# EAGLE board color_sensor_node-Panel (EAGLE 9.6.0)
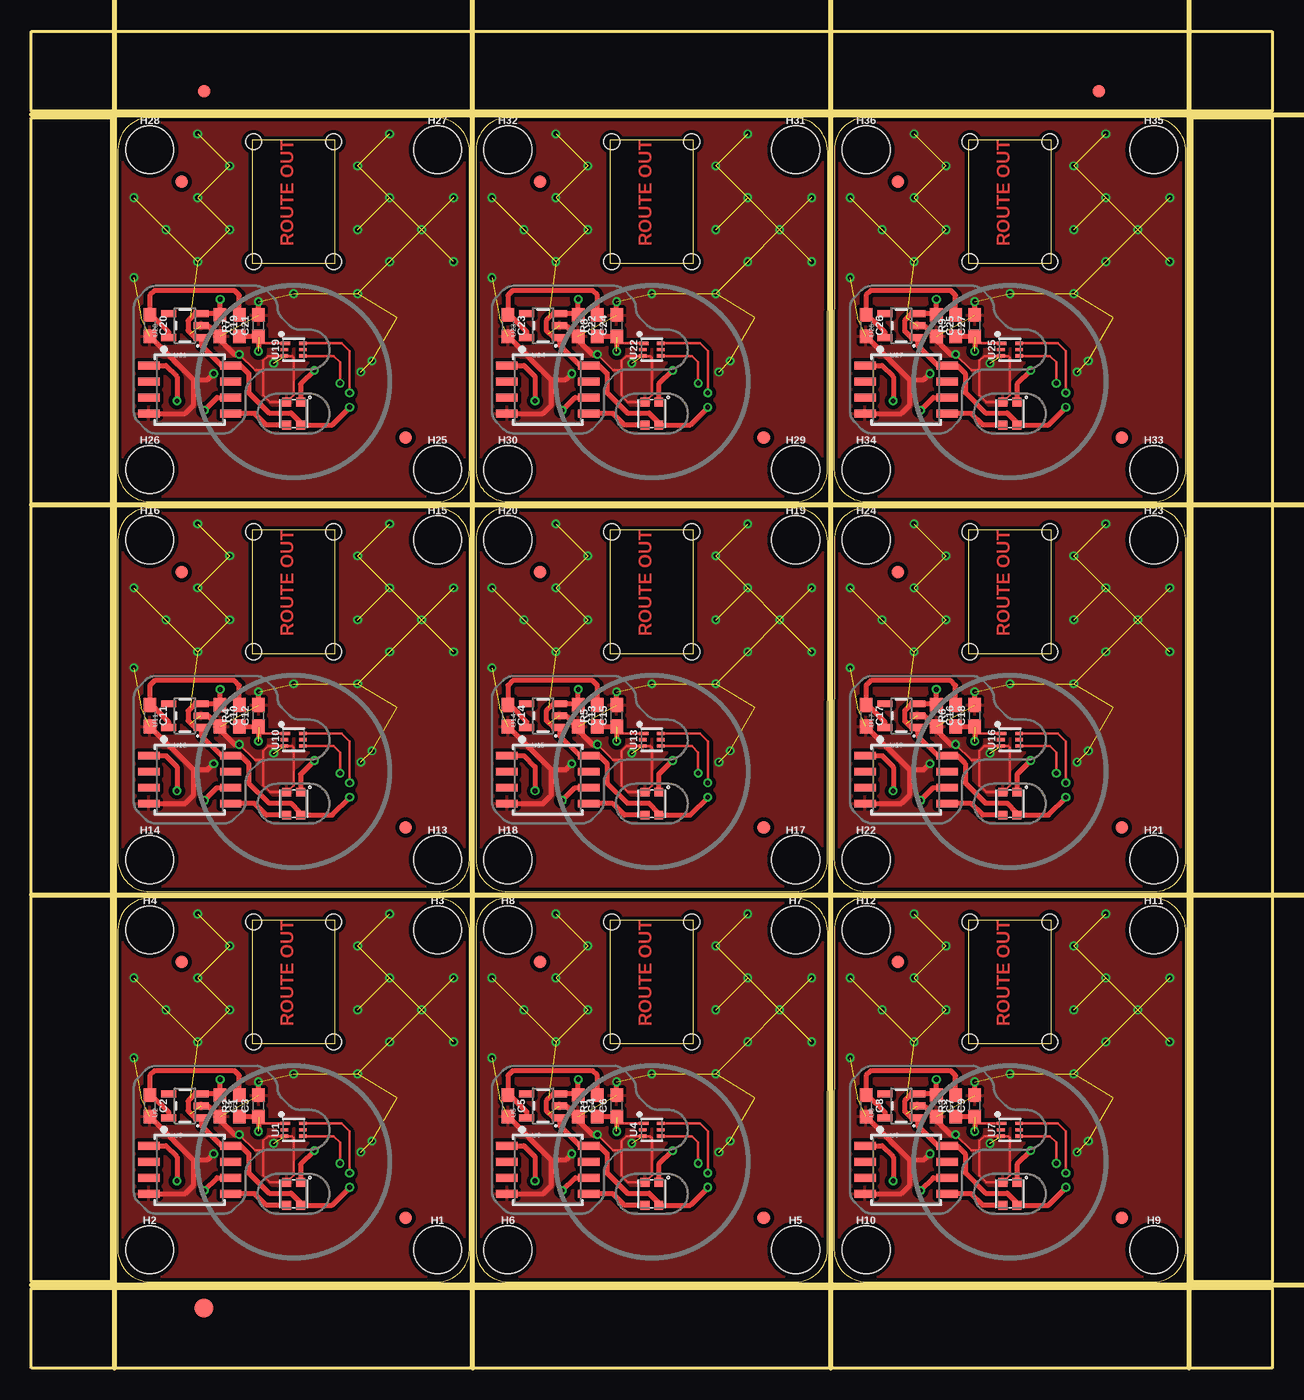
[diagram p0: board, top side]
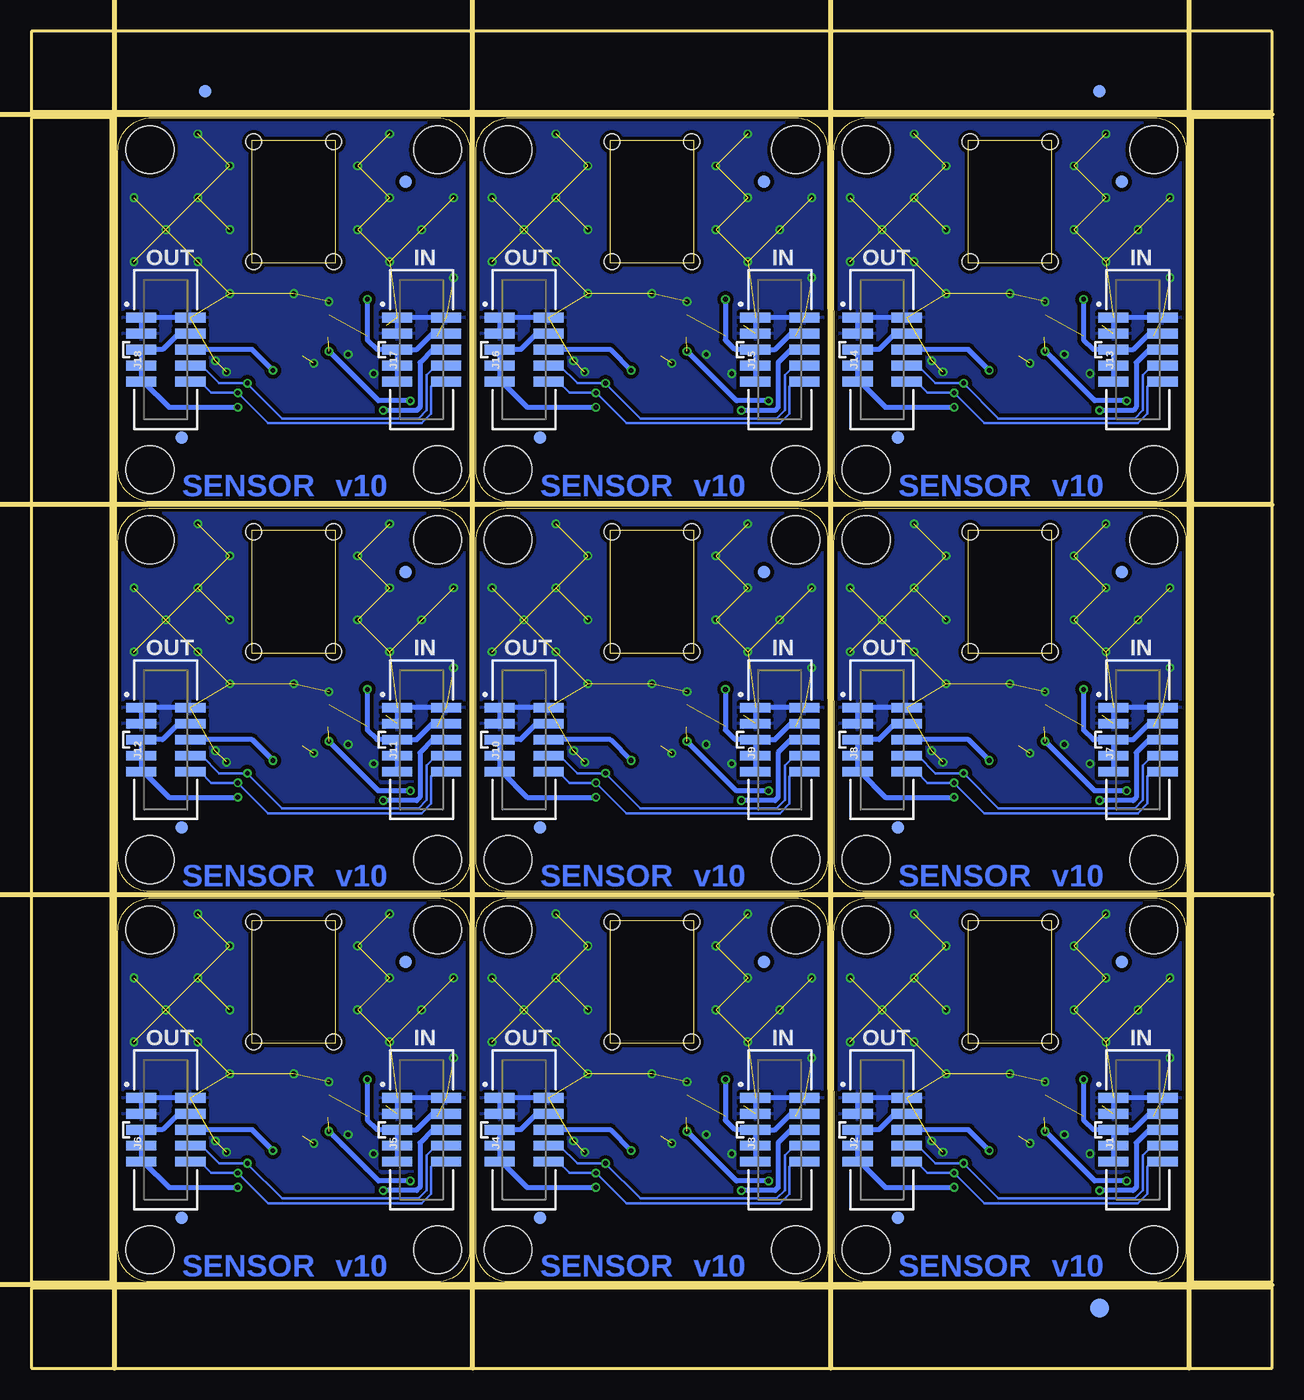
[diagram p1: board, bottom side, seen from below]

Size 98.56 x 106.17 mm. Coordinates in mm from the lower left corner, seen from the top.
Outline: 6.87,34.81 6.86,9.4 arc90 9.4,6.86 32.26,6.86 arc90 34.79,9.39 34.8,34.65 arc90 32.12,37.34 9.4,37.34 arc90 6.87,34.81
Outline: 17.53,35.56 17.53,25.78 24.13,25.78 24.13,35.56 17.53,35.56
Outline: 35.32,34.81 35.31,9.4 arc90 37.85,6.86 60.71,6.86 arc90 63.24,9.39 63.25,34.65 arc90 60.56,37.34 37.85,37.34 arc90 35.32,34.81
Outline: 45.98,35.56 45.98,25.78 52.58,25.78 52.58,35.56 45.98,35.56
Outline: 63.77,34.81 63.76,9.4 arc90 66.3,6.86 89.16,6.86 arc90 91.7,9.39 91.7,34.65 arc90 89.02,37.34 66.3,37.34 arc90 63.77,34.81
Outline: 74.43,35.56 74.43,25.78 81.03,25.78 81.03,35.56 74.43,35.56
Outline: 6.87,65.79 6.86,40.39 arc90 9.4,37.85 32.26,37.85 arc90 34.79,40.38 34.8,65.64 arc90 32.12,68.33 9.4,68.33 arc90 6.87,65.79
Outline: 17.53,66.55 17.53,56.77 24.13,56.77 24.13,66.55 17.53,66.55
Outline: 35.32,65.79 35.31,40.39 arc90 37.85,37.85 60.71,37.85 arc90 63.24,40.38 63.25,65.64 arc90 60.56,68.33 37.85,68.33 arc90 35.32,65.79
Outline: 45.98,66.55 45.98,56.77 52.58,56.77 52.58,66.55 45.98,66.55
Outline: 63.77,65.79 63.76,40.39 arc90 66.3,37.85 89.16,37.85 arc90 91.7,40.38 91.7,65.64 arc90 89.02,68.33 66.3,68.33 arc90 63.77,65.79
Outline: 74.43,66.55 74.43,56.77 81.03,56.77 81.03,66.55 74.43,66.55
Outline: 6.87,96.78 6.86,71.38 arc90 9.4,68.83 32.26,68.83 arc90 34.79,71.37 34.8,96.62 arc90 32.12,99.31 9.4,99.31 arc90 6.87,96.78
Outline: 17.53,97.54 17.53,87.76 24.13,87.76 24.13,97.54 17.53,97.54
Outline: 35.32,96.78 35.31,71.38 arc90 37.85,68.83 60.71,68.83 arc90 63.24,71.37 63.25,96.62 arc90 60.56,99.31 37.85,99.31 arc90 35.32,96.78
Outline: 45.98,97.54 45.98,87.76 52.58,87.76 52.58,97.54 45.98,97.54
Outline: 63.77,96.78 63.76,71.38 arc90 66.3,68.83 89.16,68.83 arc90 91.7,71.37 91.7,96.62 arc90 89.02,99.31 66.3,99.31 arc90 63.77,96.78
Outline: 74.43,97.54 74.43,87.76 81.03,87.76 81.03,97.54 74.43,97.54
Outline: 0,6.35 98.56,6.35 98.56,0 0,0 0,6.35
Outline: 92.21,99.31 98.56,99.31 98.56,6.86 92.21,6.86 92.21,99.31
Outline: 0,106.17 98.56,106.17 98.56,99.82 0,99.82 0,106.17
Outline: 0,99.31 6.35,99.31 6.35,6.86 0,6.86 0,99.31
Copper layers (1*16): Top 0.035mm / dielectric 1.5mm / Bottom 0.035mm
Design rules "color_sensor_node": minimum track width 6mil, minimum drill 0.3mm, track to track 6mil, track to pad 6mil, pad to pad 6mil, via to via 6mil, smd to smd 6mil, copper to edge 6mil, drill to drill 6mil, minimum pad ring 6mil, minimum via ring 6mil, stop-mask expansion 4mil, vias tented up to drill 25mil, thermal gap 10mil
Holes 1.27 mm at 17.65,35.43 24,35.43 17.65,25.91 24,25.91 46.1,35.43 52.45,35.43 46.1,25.91 52.45,25.91 74.55,35.43 80.9,35.43 74.55,25.91 80.9,25.91 17.65,66.42 24,66.42 17.65,56.9 24,56.9 46.1,66.42 52.45,66.42 46.1,56.9 52.45,56.9 74.55,66.42 80.9,66.42 74.55,56.9 80.9,56.9 17.65,97.41 24,97.41 17.65,87.88 24,87.88 46.1,97.41 52.45,97.41 46.1,87.88 52.45,87.88 74.55,97.41 80.9,97.41 74.55,87.88 80.9,87.88
Milling: 8 lines

## Footprints (pad centres in the part's own frame; a part is rotated, then mirrored left to right if it is on the bottom)
0603 = smd 1.1 x 1: 1 -0.85,0; 2 0.85,0
WS2812-2020 = smd 0.7 x 0.7: 1 0.915,-0.55; 2 0.915,0.55; 3 -0.915,0.55; 4 -0.915,-0.55
FIDUCIAL-1X2 = smd 1 x 1: 1 0,0
FIDUCIAL-1.5X3 = smd 1.5 x 1.5: 1 0,0
STAND-OFF-#8 = hole 3.81: 0,0
2X5-SMD-1.27MM = smd 0.76 x 2.4: 1 2.54,1.95; 2 2.54,-1.95; 3 1.27,1.95; 4 1.27,-1.95; 5 0,1.95; 6 0,-1.95; 7 -1.27,1.95; 8 -1.27,-1.95; 9 -2.54,1.95; 10 -2.54,-1.95
ODFN-6 = smd 0.75 x 0.25: 1 -0.645,0.5 | smd 0.6 x 0.25: 2 -0.72,0; 3 -0.72,-0.5; 4 0.72,-0.5; 5 0.72,0; 6 0.72,0.5
SOT23-5 = smd 0.55 x 1.2: 1 -0.95,-1.3; 2 0,-1.3; 3 0.95,-1.3; 4 0.95,1.3; 5 -0.95,1.3
SOIC-8 = smd 0.61 x 1.702: 1 -1.905,-3.251; 2 -0.635,-3.251; 3 0.635,-3.251; 4 1.905,-3.251; 5 1.905,3.251; 6 0.635,3.251; 7 -0.635,3.251; 8 -1.905,3.251

## Placement (x,y rotation side)
C1  1.0uF  [0603]  14.99,20.83 270 top
C2  1.0uF  [0603]  9.4,20.83 270 top
C3  1.0uF  [0603]  18.03,20.83 90 top
C4  1.0uF  [0603]  43.44,20.83 270 top
C5  1.0uF  [0603]  37.85,20.83 270 top
C6  1.0uF  [0603]  46.48,20.83 90 top
C7  1.0uF  [0603]  71.89,20.83 270 top
C8  1.0uF  [0603]  66.3,20.83 270 top
C9  1.0uF  [0603]  74.94,20.83 90 top
C10  1.0uF  [0603]  14.99,51.82 270 top
C11  1.0uF  [0603]  9.4,51.82 270 top
C12  1.0uF  [0603]  18.03,51.82 90 top
C13  1.0uF  [0603]  43.44,51.82 270 top
C14  1.0uF  [0603]  37.85,51.82 270 top
C15  1.0uF  [0603]  46.48,51.82 90 top
C16  1.0uF  [0603]  71.89,51.82 270 top
C17  1.0uF  [0603]  66.3,51.82 270 top
C18  1.0uF  [0603]  74.94,51.82 90 top
C19  1.0uF  [0603]  14.99,82.8 270 top
C20  1.0uF  [0603]  9.4,82.8 270 top
C21  1.0uF  [0603]  18.03,82.8 90 top
C22  1.0uF  [0603]  43.44,82.8 270 top
C23  1.0uF  [0603]  37.85,82.8 270 top
C24  1.0uF  [0603]  46.48,82.8 90 top
C25  1.0uF  [0603]  71.89,82.8 270 top
C26  1.0uF  [0603]  66.3,82.8 270 top
C27  1.0uF  [0603]  74.94,82.8 90 top
D1  WS2812B  [WS2812-2020]  20.83,13.84 90 top
D2  WS2812B  [WS2812-2020]  49.28,13.84 90 top
D3  WS2812B  [WS2812-2020]  77.73,13.84 90 top
D4  WS2812B  [WS2812-2020]  20.83,44.83 90 top
D5  WS2812B  [WS2812-2020]  49.28,44.83 90 top
D6  WS2812B  [WS2812-2020]  77.73,44.83 90 top
D7  WS2812B  [WS2812-2020]  20.83,75.82 90 top
D8  WS2812B  [WS2812-2020]  49.28,75.82 90 top
D9  WS2812B  [WS2812-2020]  77.73,75.82 90 top
E$1  [FIDUCIAL-1X2]  13.72,101.41 0 top
E$2  [FIDUCIAL-1X2]  13.72,101.41 0 bottom
E$3  [FIDUCIAL-1X2]  84.78,101.41 0 top
E$4  [FIDUCIAL-1X2]  84.78,101.41 0 bottom
E$5  [FIDUCIAL-1.5X3]  13.72,4.76 0 top
E$6  [FIDUCIAL-1.5X3]  13.72,4.76 0 bottom
FD1  FIDUCIAL1X2  [FIDUCIAL-1X2]  11.94,32.26 0 top
FD2  FIDUCIAL1X2  [FIDUCIAL-1X2]  29.72,11.94 0 top
FD3  FIDUCIAL1X2  [FIDUCIAL-1X2]  11.94,32.26 0 bottom
FD4  FIDUCIAL1X2  [FIDUCIAL-1X2]  29.72,11.94 0 bottom
FD5  FIDUCIAL1X2  [FIDUCIAL-1X2]  40.39,32.26 0 top
FD6  FIDUCIAL1X2  [FIDUCIAL-1X2]  58.17,11.94 0 top
FD7  FIDUCIAL1X2  [FIDUCIAL-1X2]  40.39,32.26 0 bottom
FD8  FIDUCIAL1X2  [FIDUCIAL-1X2]  58.17,11.94 0 bottom
FD9  FIDUCIAL1X2  [FIDUCIAL-1X2]  68.84,32.26 0 top
FD10  FIDUCIAL1X2  [FIDUCIAL-1X2]  86.62,11.94 0 top
FD11  FIDUCIAL1X2  [FIDUCIAL-1X2]  68.84,32.26 0 bottom
FD12  FIDUCIAL1X2  [FIDUCIAL-1X2]  86.62,11.94 0 bottom
FD13  FIDUCIAL1X2  [FIDUCIAL-1X2]  11.94,63.25 0 top
FD14  FIDUCIAL1X2  [FIDUCIAL-1X2]  29.72,42.93 0 top
FD15  FIDUCIAL1X2  [FIDUCIAL-1X2]  11.94,63.25 0 bottom
FD16  FIDUCIAL1X2  [FIDUCIAL-1X2]  29.72,42.93 0 bottom
FD17  FIDUCIAL1X2  [FIDUCIAL-1X2]  40.39,63.25 0 top
FD18  FIDUCIAL1X2  [FIDUCIAL-1X2]  58.17,42.93 0 top
FD19  FIDUCIAL1X2  [FIDUCIAL-1X2]  40.39,63.25 0 bottom
FD20  FIDUCIAL1X2  [FIDUCIAL-1X2]  58.17,42.93 0 bottom
FD21  FIDUCIAL1X2  [FIDUCIAL-1X2]  68.84,63.25 0 top
FD22  FIDUCIAL1X2  [FIDUCIAL-1X2]  86.62,42.93 0 top
FD23  FIDUCIAL1X2  [FIDUCIAL-1X2]  68.84,63.25 0 bottom
FD24  FIDUCIAL1X2  [FIDUCIAL-1X2]  86.62,42.93 0 bottom
FD25  FIDUCIAL1X2  [FIDUCIAL-1X2]  11.94,94.23 0 top
FD26  FIDUCIAL1X2  [FIDUCIAL-1X2]  29.72,73.91 0 top
FD27  FIDUCIAL1X2  [FIDUCIAL-1X2]  11.94,94.23 0 bottom
FD28  FIDUCIAL1X2  [FIDUCIAL-1X2]  29.72,73.91 0 bottom
FD29  FIDUCIAL1X2  [FIDUCIAL-1X2]  40.39,94.23 0 top
FD30  FIDUCIAL1X2  [FIDUCIAL-1X2]  58.17,73.91 0 top
FD31  FIDUCIAL1X2  [FIDUCIAL-1X2]  40.39,94.23 0 bottom
FD32  FIDUCIAL1X2  [FIDUCIAL-1X2]  58.17,73.91 0 bottom
FD33  FIDUCIAL1X2  [FIDUCIAL-1X2]  68.84,94.23 0 top
FD34  FIDUCIAL1X2  [FIDUCIAL-1X2]  86.62,73.91 0 top
FD35  FIDUCIAL1X2  [FIDUCIAL-1X2]  68.84,94.23 0 bottom
FD36  FIDUCIAL1X2  [FIDUCIAL-1X2]  86.62,73.91 0 bottom
H1  STAND-OFF#8  [STAND-OFF-#8]  32.26,9.4 0 top
H2  STAND-OFF#8  [STAND-OFF-#8]  9.4,9.4 0 top
H3  STAND-OFF#8  [STAND-OFF-#8]  32.26,34.8 0 top
H4  STAND-OFF#8  [STAND-OFF-#8]  9.4,34.8 0 top
H5  STAND-OFF#8  [STAND-OFF-#8]  60.71,9.4 0 top
H6  STAND-OFF#8  [STAND-OFF-#8]  37.85,9.4 0 top
H7  STAND-OFF#8  [STAND-OFF-#8]  60.71,34.8 0 top
H8  STAND-OFF#8  [STAND-OFF-#8]  37.85,34.8 0 top
H9  STAND-OFF#8  [STAND-OFF-#8]  89.16,9.4 0 top
H10  STAND-OFF#8  [STAND-OFF-#8]  66.3,9.4 0 top
H11  STAND-OFF#8  [STAND-OFF-#8]  89.16,34.8 0 top
H12  STAND-OFF#8  [STAND-OFF-#8]  66.3,34.8 0 top
H13  STAND-OFF#8  [STAND-OFF-#8]  32.26,40.39 0 top
H14  STAND-OFF#8  [STAND-OFF-#8]  9.4,40.39 0 top
H15  STAND-OFF#8  [STAND-OFF-#8]  32.26,65.79 0 top
H16  STAND-OFF#8  [STAND-OFF-#8]  9.4,65.79 0 top
H17  STAND-OFF#8  [STAND-OFF-#8]  60.71,40.39 0 top
H18  STAND-OFF#8  [STAND-OFF-#8]  37.85,40.39 0 top
H19  STAND-OFF#8  [STAND-OFF-#8]  60.71,65.79 0 top
H20  STAND-OFF#8  [STAND-OFF-#8]  37.85,65.79 0 top
H21  STAND-OFF#8  [STAND-OFF-#8]  89.16,40.39 0 top
H22  STAND-OFF#8  [STAND-OFF-#8]  66.3,40.39 0 top
H23  STAND-OFF#8  [STAND-OFF-#8]  89.16,65.79 0 top
H24  STAND-OFF#8  [STAND-OFF-#8]  66.3,65.79 0 top
H25  STAND-OFF#8  [STAND-OFF-#8]  32.26,71.37 0 top
H26  STAND-OFF#8  [STAND-OFF-#8]  9.4,71.37 0 top
H27  STAND-OFF#8  [STAND-OFF-#8]  32.26,96.77 0 top
H28  STAND-OFF#8  [STAND-OFF-#8]  9.4,96.77 0 top
H29  STAND-OFF#8  [STAND-OFF-#8]  60.71,71.37 0 top
H30  STAND-OFF#8  [STAND-OFF-#8]  37.85,71.37 0 top
H31  STAND-OFF#8  [STAND-OFF-#8]  60.71,96.77 0 top
H32  STAND-OFF#8  [STAND-OFF-#8]  37.85,96.77 0 top
H33  STAND-OFF#8  [STAND-OFF-#8]  89.16,71.37 0 top
H34  STAND-OFF#8  [STAND-OFF-#8]  66.3,71.37 0 top
H35  STAND-OFF#8  [STAND-OFF-#8]  89.16,96.77 0 top
H36  STAND-OFF#8  [STAND-OFF-#8]  66.3,96.77 0 top
J1  JTAG  [2X5-SMD-1.27MM]  10.67,18.92 90 bottom
J2  JTAG  [2X5-SMD-1.27MM]  30.99,18.92 90 bottom
J3  JTAG  [2X5-SMD-1.27MM]  39.12,18.92 90 bottom
J4  JTAG  [2X5-SMD-1.27MM]  59.44,18.92 90 bottom
J5  JTAG  [2X5-SMD-1.27MM]  67.57,18.92 90 bottom
J6  JTAG  [2X5-SMD-1.27MM]  87.89,18.92 90 bottom
J7  JTAG  [2X5-SMD-1.27MM]  10.67,49.91 90 bottom
J8  JTAG  [2X5-SMD-1.27MM]  30.99,49.91 90 bottom
J9  JTAG  [2X5-SMD-1.27MM]  39.12,49.91 90 bottom
J10  JTAG  [2X5-SMD-1.27MM]  59.44,49.91 90 bottom
J11  JTAG  [2X5-SMD-1.27MM]  67.57,49.91 90 bottom
J12  JTAG  [2X5-SMD-1.27MM]  87.89,49.91 90 bottom
J13  JTAG  [2X5-SMD-1.27MM]  10.67,80.9 90 bottom
J14  JTAG  [2X5-SMD-1.27MM]  30.99,80.9 90 bottom
J15  JTAG  [2X5-SMD-1.27MM]  39.12,80.9 90 bottom
J16  JTAG  [2X5-SMD-1.27MM]  59.44,80.9 90 bottom
J17  JTAG  [2X5-SMD-1.27MM]  67.57,80.9 90 bottom
J18  JTAG  [2X5-SMD-1.27MM]  87.89,80.9 90 bottom
R1  220  [0603]  44.96,20.83 90 top
R2  220  [0603]  16.51,20.83 90 top
R3  220  [0603]  73.41,20.83 90 top
R4  220  [0603]  16.51,51.82 90 top
R5  220  [0603]  44.96,51.82 90 top
R6  220  [0603]  73.41,51.82 90 top
R7  220  [0603]  16.51,82.8 90 top
R8  220  [0603]  44.96,82.8 90 top
R9  220  [0603]  73.41,82.8 90 top
U1  ISL29125  [ODFN-6]  20.83,18.92 0 top
U2  3.3V  [SOT23-5]  12.19,20.83 90 top
U3  WS2811  [SOIC-8]  12.57,15.75 270 top
U4  ISL29125  [ODFN-6]  49.28,18.92 0 top
U5  3.3V  [SOT23-5]  40.64,20.83 90 top
U6  WS2811  [SOIC-8]  41.02,15.75 270 top
U7  ISL29125  [ODFN-6]  77.73,18.92 0 top
U8  3.3V  [SOT23-5]  69.09,20.83 90 top
U9  WS2811  [SOIC-8]  69.47,15.75 270 top
U10  ISL29125  [ODFN-6]  20.83,49.91 0 top
U11  3.3V  [SOT23-5]  12.19,51.82 90 top
U12  WS2811  [SOIC-8]  12.57,46.74 270 top
U13  ISL29125  [ODFN-6]  49.28,49.91 0 top
U14  3.3V  [SOT23-5]  40.64,51.82 90 top
U15  WS2811  [SOIC-8]  41.02,46.74 270 top
U16  ISL29125  [ODFN-6]  77.73,49.91 0 top
U17  3.3V  [SOT23-5]  69.09,51.82 90 top
U18  WS2811  [SOIC-8]  69.47,46.74 270 top
U19  ISL29125  [ODFN-6]  20.83,80.9 0 top
U20  3.3V  [SOT23-5]  12.19,82.8 90 top
U21  WS2811  [SOIC-8]  12.57,77.72 270 top
U22  ISL29125  [ODFN-6]  49.28,80.9 0 top
U23  3.3V  [SOT23-5]  40.64,82.8 90 top
U24  WS2811  [SOIC-8]  41.02,77.72 270 top
U25  ISL29125  [ODFN-6]  77.73,80.9 0 top
U26  3.3V  [SOT23-5]  69.09,82.8 90 top
U27  WS2811  [SOIC-8]  69.47,77.72 270 top

## Library data of the parts
C1-C27 = SparkFun-Capacitors; PROD_ID: CAP-00868
D1-D9 = SparkFun-LED
E$1-E$4 FD1-FD36 = SparkFun-Aesthetics
E$5 E$6 = SparkFun-Retired
H1-H36 = standoff
J1-J18 = SparkFun-Connectors; PROD_ID: CONN-14503
R1-R9 = SparkFun-Resistors; PROD_ID: RES-07861
U1 U4 U7 U10 U13 U16 U19 U22 U25 = SparkFun-Sensors; PROD_ID: IC-12055
U2 U5 U8 U11 U14 U17 U20 U23 U26 = SparkFun-IC-Power; PROD_ID: VREG-12457
U3 U6 U9 U12 U15 U18 U21 U24 U27 = ws2811

## Nets
3.3V: C2.1 R2.2 U2.5
3.3V1: C5.1 R1.2 U5.5
3.3V2: C8.1 R3.2 U8.5
3.3V3: C11.1 R4.2 U11.5
3.3V4: C14.1 R5.2 U14.5
3.3V5: C17.1 R6.2 U17.5
3.3V6: C20.1 R7.2 U20.5
3.3V7: C23.1 R8.2 U23.5
3.3V8: C26.1 R9.2 U26.5
5V: C1.1 D1.4 J1.4 J1.5 J1.7 J1.9 J2.4 J2.5 J2.7 J2.9 U2.1 U2.3 U3.8
5V1: C4.1 D2.4 J3.4 J3.5 J3.7 J3.9 J4.4 J4.5 J4.7 J4.9 U5.1 U5.3 U6.8
5V2: C7.1 D3.4 J5.4 J5.5 J5.7 J5.9 J6.4 J6.5 J6.7 J6.9 U8.1 U8.3 U9.8
5V3: C10.1 D4.4 J7.4 J7.5 J7.7 J7.9 J8.4 J8.5 J8.7 J8.9 U11.1 U11.3 U12.8
5V4: C13.1 D5.4 J9.4 J9.5 J9.7 J9.9 J10.4 J10.5 J10.7 J10.9 U14.1 U14.3 U15.8
5V5: C16.1 D6.4 J11.4 J11.5 J11.7 J11.9 J12.4 J12.5 J12.7 J12.9 U17.1 U17.3 U18.8
5V6: C19.1 D7.4 J13.4 J13.5 J13.7 J13.9 J14.4 J14.5 J14.7 J14.9 U20.1 U20.3 U21.8
5V7: C22.1 D8.4 J15.4 J15.5 J15.7 J15.9 J16.4 J16.5 J16.7 J16.9 U23.1 U23.3 U24.8
5V8: C25.1 D9.4 J17.4 J17.5 J17.7 J17.9 J18.4 J18.5 J18.7 J18.9 U26.1 U26.3 U27.8
DIN: J1.6 U3.6
DIN1: J3.6 U6.6
DIN2: J5.6 U9.6
DIN3: J7.6 U12.6
DIN4: J9.6 U15.6
DIN5: J11.6 U18.6
DIN6: J13.6 U21.6
DIN7: J15.6 U24.6
DIN8: J17.6 U27.6
DOUT: D1.1 J2.6
DOUT1: D2.1 J4.6
DOUT2: D3.1 J6.6
DOUT3: D4.1 J8.6
DOUT4: D5.1 J10.6
DOUT5: D6.1 J12.6
DOUT6: D7.1 J14.6
DOUT7: D8.1 J16.6
DOUT8: D9.1 J18.6
GND: C1.2 C2.2 C3.2 D1.2 J1.1 J1.2 J1.3 J2.1 J2.2 J2.3 U1.3 U2.2 U3.4
GND1: C4.2 C5.2 C6.2 D2.2 J3.1 J3.2 J3.3 J4.1 J4.2 J4.3 U4.3 U5.2 U6.4
GND2: C7.2 C8.2 C9.2 D3.2 J5.1 J5.2 J5.3 J6.1 J6.2 J6.3 U7.3 U8.2 U9.4
GND3: C10.2 C11.2 C12.2 D4.2 J7.1 J7.2 J7.3 J8.1 J8.2 J8.3 U10.3 U11.2 U12.4
GND4: C13.2 C14.2 C15.2 D5.2 J9.1 J9.2 J9.3 J10.1 J10.2 J10.3 U13.3 U14.2 U15.4
GND5: C16.2 C17.2 C18.2 D6.2 J11.1 J11.2 J11.3 J12.1 J12.2 J12.3 U16.3 U17.2 U18.4
GND6: C19.2 C20.2 C21.2 D7.2 J13.1 J13.2 J13.3 J14.1 J14.2 J14.3 U19.3 U20.2 U21.4
GND7: C22.2 C23.2 C24.2 D8.2 J15.1 J15.2 J15.3 J16.1 J16.2 J16.3 U22.3 U23.2 U24.4
GND8: C25.2 C26.2 C27.2 D9.2 J17.1 J17.2 J17.3 J18.1 J18.2 J18.3 U25.3 U26.2 U27.4
N$1: D2.3 U6.5
N$2: C3.1 R2.1 U1.1 U3.1
N$3: C6.1 R1.1 U4.1 U6.1
N$4: D1.3 U3.5
N$5: D3.3 U9.5
N$6: C9.1 R3.1 U7.1 U9.1
N$7: D4.3 U12.5
N$8: C12.1 R4.1 U10.1 U12.1
N$9: D5.3 U15.5
N$10: C15.1 R5.1 U13.1 U15.1
N$11: D6.3 U18.5
N$12: C18.1 R6.1 U16.1 U18.1
N$13: D7.3 U21.5
N$14: C21.1 R7.1 U19.1 U21.1
N$15: D8.3 U24.5
N$16: C24.1 R8.1 U22.1 U24.1
N$17: D9.3 U27.5
N$18: C27.1 R9.1 U25.1 U27.1
SCL: J1.10 J2.10 U1.6
SCL1: J3.10 J4.10 U4.6
SCL2: J5.10 J6.10 U7.6
SCL3: J7.10 J8.10 U10.6
SCL4: J9.10 J10.10 U13.6
SCL5: J11.10 J12.10 U16.6
SCL6: J13.10 J14.10 U19.6
SCL7: J15.10 J16.10 U22.6
SCL8: J17.10 J18.10 U25.6
SDA: J1.8 J2.8 U1.4
SDA1: J3.8 J4.8 U4.4
SDA2: J5.8 J6.8 U7.4
SDA3: J7.8 J8.8 U10.4
SDA4: J9.8 J10.8 U13.4
SDA5: J11.8 J12.8 U16.4
SDA6: J13.8 J14.8 U19.4
SDA7: J15.8 J16.8 U22.4
SDA8: J17.8 J18.8 U25.4

## Tracks (layer width: path | path; a pad name or v marks a point on that pad's centre or on a via)
3.3V
  Top 0.406: R2.2 16.51,23.24 16.13,23.62 9.78,23.62 9.4,23.24 C2.1 9.56,21.68 10.89,20.35 U2.5
3.3V1
  Top 0.406: R1.2 44.96,23.24 44.58,23.62 38.23,23.62 37.85,23.24 C5.1 38.02,21.68 39.34,20.35 U5.5
3.3V2
  Top 0.406: R3.2 73.41,23.24 73.03,23.62 66.68,23.62 66.3,23.24 C8.1 66.47,21.68 67.79,20.35 U8.5
3.3V3
  Top 0.406: R4.2 16.51,54.23 16.13,54.61 9.78,54.61 9.4,54.23 C11.1 9.56,52.67 10.89,51.34 U11.5
3.3V4
  Top 0.406: R5.2 44.96,54.23 44.58,54.61 38.23,54.61 37.85,54.23 C14.1 38.02,52.67 39.34,51.34 U14.5
3.3V5
  Top 0.406: R6.2 73.41,54.23 73.03,54.61 66.68,54.61 66.3,54.23 C17.1 66.47,52.67 67.79,51.34 U17.5
3.3V6
  Top 0.406: R7.2 16.51,85.22 16.13,85.6 9.78,85.6 9.4,85.22 C20.1 9.56,83.65 10.89,82.33 U20.5
3.3V7
  Top 0.406: R8.2 44.96,85.22 44.58,85.6 38.23,85.6 37.85,85.22 C23.1 38.02,83.65 39.34,82.33 U23.5
3.3V8
  Top 0.406: R9.2 73.41,85.22 73.03,85.6 66.68,85.6 66.3,85.22 C26.1 66.47,83.65 67.79,82.33 U26.5
5V  (via drill 0.38)
  Top 0.406: v14.99,22.92 C1.1 14.89,21.78 U2.3 13.02,21.78 12.45,21.21 12.45,20.45 13.02,19.88 U2.1 13.49,19.27 15.11,17.65 U3.8 16.64,17.65 17.27,17.02 17.27,15.49 18.88,13.88 20.61,13.88 21.38,13.12 D1.4 23.89,12.93 25.27,14.31 v25.27,14.35
  Bottom 0.406: J1.5 J1.7 J1.9 | J2.4 29.97,20.19 31.24,18.92 J2.5 J2.7 J2.9 32.77,16.38 30.73,14.35 v25.27,14.35 | J1.4 9.78,20.19 11.05,18.92 J1.5 | v14.99,22.92 14.99,19.68 14.22,18.92 J1.5
5V1  (via drill 0.38)
  Top 0.406: v43.44,22.92 C4.1 43.34,21.78 U5.3 41.47,21.78 40.9,21.21 40.9,20.45 41.47,19.88 U5.1 41.94,19.27 43.56,17.65 U6.8 45.09,17.65 45.72,17.02 45.72,15.49 47.33,13.88 49.07,13.88 49.83,13.12 D2.4 52.34,12.93 53.72,14.31 v53.72,14.35
  Bottom 0.406: J3.5 J3.7 J3.9 | J4.4 58.42,20.19 59.69,18.92 J4.5 J4.7 J4.9 61.22,16.38 59.18,14.35 v53.72,14.35 | J3.4 38.23,20.19 39.5,18.92 J3.5 | v43.44,22.92 43.44,19.68 42.67,18.92 J3.5
5V2  (via drill 0.38)
  Top 0.406: v71.89,22.92 C7.1 71.79,21.78 U8.3 69.92,21.78 69.35,21.21 69.35,20.45 69.92,19.88 U8.1 70.39,19.27 72.01,17.65 U9.8 73.54,17.65 74.17,17.02 74.17,15.49 75.78,13.88 77.52,13.88 78.28,13.12 D3.4 80.79,12.93 82.17,14.31 v82.17,14.35
  Bottom 0.406: J5.5 J5.7 J5.9 | J6.4 86.87,20.19 88.14,18.92 J6.5 J6.7 J6.9 89.67,16.38 87.64,14.35 v82.17,14.35 | J5.4 66.68,20.19 67.95,18.92 J5.5 | v71.89,22.92 71.89,19.68 71.12,18.92 J5.5
5V3  (via drill 0.38)
  Top 0.406: v14.99,53.91 C10.1 14.89,52.77 U11.3 13.02,52.77 12.45,52.2 12.45,51.43 13.02,50.87 U11.1 13.49,50.26 15.11,48.64 U12.8 16.64,48.64 17.27,48.01 17.27,46.48 18.88,44.87 20.61,44.87 21.38,44.11 D4.4 23.89,43.92 25.27,45.3 v25.27,45.34
  Bottom 0.406: J7.5 J7.7 J7.9 | J8.4 29.97,51.18 31.24,49.91 J8.5 J8.7 J8.9 32.77,47.37 30.73,45.34 v25.27,45.34 | J7.4 9.78,51.18 11.05,49.91 J7.5 | v14.99,53.91 14.99,50.67 14.22,49.91 J7.5
5V4  (via drill 0.38)
  Top 0.406: v43.44,53.91 C13.1 43.34,52.77 U14.3 41.47,52.77 40.9,52.2 40.9,51.43 41.47,50.87 U14.1 41.94,50.26 43.56,48.64 U15.8 45.09,48.64 45.72,48.01 45.72,46.48 47.33,44.87 49.07,44.87 49.83,44.11 D5.4 52.34,43.92 53.72,45.3 v53.72,45.34
  Bottom 0.406: J9.5 J9.7 J9.9 | J10.4 58.42,51.18 59.69,49.91 J10.5 J10.7 J10.9 61.22,47.37 59.18,45.34 v53.72,45.34 | J9.4 38.23,51.18 39.5,49.91 J9.5 | v43.44,53.91 43.44,50.67 42.67,49.91 J9.5
5V5  (via drill 0.38)
  Top 0.406: v71.89,53.91 C16.1 71.79,52.77 U17.3 69.92,52.77 69.35,52.2 69.35,51.43 69.92,50.87 U17.1 70.39,50.26 72.01,48.64 U18.8 73.54,48.64 74.17,48.01 74.17,46.48 75.78,44.87 77.52,44.87 78.28,44.11 D6.4 80.79,43.92 82.17,45.3 v82.17,45.34
  Bottom 0.406: J11.5 J11.7 J11.9 | J12.4 86.87,51.18 88.14,49.91 J12.5 J12.7 J12.9 89.67,47.37 87.64,45.34 v82.17,45.34 | J11.4 66.68,51.18 67.95,49.91 J11.5 | v71.89,53.91 71.89,50.67 71.12,49.91 J11.5
5V6  (via drill 0.38)
  Top 0.406: v14.99,84.9 C19.1 14.89,83.75 U20.3 13.02,83.75 12.45,83.19 12.45,82.42 13.02,81.85 U20.1 13.49,81.25 15.11,79.63 U21.8 16.64,79.63 17.27,78.99 17.27,77.47 18.88,75.86 20.61,75.86 21.38,75.1 D7.4 23.89,74.9 25.27,76.29 v25.27,76.33
  Bottom 0.406: J13.5 J13.7 J13.9 | J14.4 29.97,82.17 31.24,80.9 J14.5 J14.7 J14.9 32.77,78.36 30.73,76.33 v25.27,76.33 | J13.4 9.78,82.17 11.05,80.9 J13.5 | v14.99,84.9 14.99,81.66 14.22,80.9 J13.5
5V7  (via drill 0.38)
  Top 0.406: v43.44,84.9 C22.1 43.34,83.75 U23.3 41.47,83.75 40.9,83.19 40.9,82.42 41.47,81.85 U23.1 41.94,81.25 43.56,79.63 U24.8 45.09,79.63 45.72,78.99 45.72,77.47 47.33,75.86 49.07,75.86 49.83,75.1 D8.4 52.34,74.9 53.72,76.29 v53.72,76.33
  Bottom 0.406: J15.5 J15.7 J15.9 | J16.4 58.42,82.17 59.69,80.9 J16.5 J16.7 J16.9 61.22,78.36 59.18,76.33 v53.72,76.33 | J15.4 38.23,82.17 39.5,80.9 J15.5 | v43.44,84.9 43.44,81.66 42.67,80.9 J15.5
5V8  (via drill 0.38)
  Top 0.406: v71.89,84.9 C25.1 71.79,83.75 U26.3 69.92,83.75 69.35,83.19 69.35,82.42 69.92,81.85 U26.1 70.39,81.25 72.01,79.63 U27.8 73.54,79.63 74.17,78.99 74.17,77.47 75.78,75.86 77.52,75.86 78.28,75.1 D9.4 80.79,74.9 82.17,76.29 v82.17,76.33
  Bottom 0.406: J17.5 J17.7 J17.9 | J18.4 86.87,82.17 88.14,80.9 J18.5 J18.7 J18.9 89.67,78.36 87.64,76.33 v82.17,76.33 | J17.4 66.68,82.17 67.95,80.9 J17.5 | v71.89,84.9 71.89,81.66 71.12,80.9 J17.5
DIN  (via drill 0.38)
  Top 0.406: v13.72,14.1 14.73,15.11 U3.6
  Bottom 0.406: J1.6 9.78,18.92 10.79,17.91 10.79,14.35 11.05,14.1 v13.72,14.1
DIN1  (via drill 0.38)
  Top 0.406: v42.17,14.1 43.18,15.11 U6.6
  Bottom 0.406: J3.6 38.23,18.92 39.25,17.91 39.25,14.35 39.5,14.1 v42.17,14.1
DIN2  (via drill 0.38)
  Top 0.406: v70.62,14.1 71.63,15.11 U9.6
  Bottom 0.406: J5.6 66.68,18.92 67.7,17.91 67.7,14.35 67.95,14.1 v70.62,14.1
DIN3  (via drill 0.38)
  Top 0.406: v13.72,45.08 14.73,46.1 U12.6
  Bottom 0.406: J7.6 9.78,49.91 10.79,48.89 10.79,45.34 11.05,45.08 v13.72,45.08
DIN4  (via drill 0.38)
  Top 0.406: v42.17,45.08 43.18,46.1 U15.6
  Bottom 0.406: J9.6 38.23,49.91 39.25,48.89 39.25,45.34 39.5,45.08 v42.17,45.08
DIN5  (via drill 0.38)
  Top 0.406: v70.62,45.08 71.63,46.1 U18.6
  Bottom 0.406: J11.6 66.68,49.91 67.7,48.89 67.7,45.34 67.95,45.08 v70.62,45.08
DIN6  (via drill 0.38)
  Top 0.406: v13.72,76.07 14.73,77.09 U21.6
  Bottom 0.406: J13.6 9.78,80.9 10.79,79.88 10.79,76.33 11.05,76.07 v13.72,76.07
DIN7  (via drill 0.38)
  Top 0.406: v42.17,76.07 43.18,77.09 U24.6
  Bottom 0.406: J15.6 38.23,80.9 39.25,79.88 39.25,76.33 39.5,76.07 v42.17,76.07
DIN8  (via drill 0.38)
  Top 0.406: v70.62,76.07 71.63,77.09 U27.6
  Bottom 0.406: J17.6 66.68,80.9 67.7,79.88 67.7,76.33 67.95,76.07 v70.62,76.07
DOUT  (via drill 0.38)
  Top 0.406: v22.48,17.27 21.38,16.17 D1.1
  Bottom 0.406: v22.48,17.27 24.13,18.92 J2.6
DOUT1  (via drill 0.38)
  Top 0.406: v50.93,17.27 49.83,16.17 D2.1
  Bottom 0.406: v50.93,17.27 52.58,18.92 J4.6
DOUT2  (via drill 0.38)
  Top 0.406: v79.38,17.27 78.28,16.17 D3.1
  Bottom 0.406: v79.38,17.27 81.03,18.92 J6.6
DOUT3  (via drill 0.38)
  Top 0.406: v22.48,48.26 21.38,47.16 D4.1
  Bottom 0.406: v22.48,48.26 24.13,49.91 J8.6
DOUT4  (via drill 0.38)
  Top 0.406: v50.93,48.26 49.83,47.16 D5.1
  Bottom 0.406: v50.93,48.26 52.58,49.91 J10.6
DOUT5  (via drill 0.38)
  Top 0.406: v79.38,48.26 78.28,47.16 D6.1
  Bottom 0.406: v79.38,48.26 81.03,49.91 J12.6
DOUT6  (via drill 0.38)
  Top 0.406: v22.48,79.25 21.38,78.15 D7.1
  Bottom 0.406: v22.48,79.25 24.13,80.9 J14.6
DOUT7  (via drill 0.38)
  Top 0.406: v50.93,79.25 49.83,78.15 D8.1
  Bottom 0.406: v50.93,79.25 52.58,80.9 J16.6
DOUT8  (via drill 0.38)
  Top 0.406: v79.38,79.25 78.28,78.15 D9.1
  Bottom 0.406: v79.38,79.25 81.03,80.9 J18.6
GND  (via drill 0.38)  (25 unrouted)
  Top 0.203: v16.51,18.54 17.75,17.3 18.41,17.3 | 18.41,17.3 18.41,18.03 18.8,18.42 U1.3 20.69,18.42 20.83,18.29 20.83,15.31 D1.2 18.95,14.76 18.41,15.3 18.41,17.3
  Top 0.406: U2.2 14.01,20.83 14.86,19.98 C1.2 14.99,19.68 16.13,18.54 v16.51,18.54 | C3.2 v18.03,22.73 | 12.83,16.55 C2.2 | U3.4 12.19,13.84 12.83,14.48 12.83,16.55 | 12.83,16.55 14.01,16.55 v14.48,17.02
  Bottom 0.406: J2.2 J2.1 J2.3 | J1.2 J1.1 J1.3
  other vias: 13.21,36.07 28.45,36.07 15.75,33.53 25.91,33.53 8.13,30.99 10.67,28.45 13.21,30.99 15.75,28.45 8.13,24.64 13.21,25.91 20.83,23.37 25.91,23.37 25.91,28.45 28.45,30.99 30.99,28.45 33.53,30.99 28.45,25.91 33.53,25.91 19.24,17.84 26.16,17.14 27.05,18.03
  pour Bottom (isolate 0.305): 32.26,6.86 9.4,6.86 arc-90 6.86,9.4 6.86,34.8 arc-90 9.4,37.34 32.26,37.34 arc-90 34.8,34.8 34.8,9.4 arc-90
  pour Top (isolate 0.305, rank 2): 32.26,6.86 9.4,6.86 arc-90 6.86,9.4 6.86,34.8 arc-90 9.4,37.34 32.26,37.34 arc-90 34.8,34.8 34.8,9.4 arc-90
GND1  (via drill 0.38)  (25 unrouted)
  Top 0.203: v44.96,18.54 46.2,17.3 46.87,17.3 | 46.87,17.3 46.87,18.03 47.25,18.42 U4.3 49.14,18.42 49.28,18.29 49.28,15.31 D2.2 47.41,14.76 46.87,15.3 46.87,17.3
  Top 0.406: U5.2 42.46,20.83 43.31,19.98 C4.2 43.44,19.68 44.58,18.54 v44.96,18.54 | C6.2 v46.48,22.73 | 41.28,16.55 C5.2 | U6.4 40.64,13.84 41.28,14.48 41.28,16.55 | 41.28,16.55 42.46,16.55 v42.93,17.02
  Bottom 0.406: J4.2 J4.1 J4.3 | J3.2 J3.1 J3.3
  other vias: 41.66,36.07 56.9,36.07 44.2,33.53 54.36,33.53 36.58,30.99 39.12,28.45 41.66,30.99 44.2,28.45 36.58,24.64 41.66,25.91 49.28,23.37 54.36,23.37 54.36,28.45 56.9,30.99 59.44,28.45 61.98,30.99 56.9,25.91 61.98,25.91 47.69,17.84 54.61,17.14 55.5,18.03
  pour Bottom (isolate 0.305): 60.71,6.86 37.85,6.86 arc-90 35.31,9.4 35.31,34.8 arc-90 37.85,37.34 60.71,37.34 arc-90 63.25,34.8 63.25,9.4 arc-90
  pour Top (isolate 0.305, rank 2): 60.71,6.86 37.85,6.86 arc-90 35.31,9.4 35.31,34.8 arc-90 37.85,37.34 60.71,37.34 arc-90 63.25,34.8 63.25,9.4 arc-90
GND2  (via drill 0.38)  (25 unrouted)
  Top 0.203: v73.41,18.54 74.66,17.3 75.32,17.3 | 75.32,17.3 75.32,18.03 75.7,18.42 U7.3 77.59,18.42 77.73,18.29 77.73,15.31 D3.2 75.86,14.76 75.32,15.3 75.32,17.3
  Top 0.406: U8.2 70.91,20.83 71.76,19.98 C7.2 71.89,19.68 73.03,18.54 v73.41,18.54 | C9.2 v74.94,22.73 | 69.73,16.55 C8.2 | U9.4 69.09,13.84 69.73,14.48 69.73,16.55 | 69.73,16.55 70.91,16.55 v71.38,17.02
  Bottom 0.406: J6.2 J6.1 J6.3 | J5.2 J5.1 J5.3
  other vias: 70.11,36.07 85.35,36.07 72.65,33.53 82.81,33.53 65.03,30.99 67.57,28.45 70.11,30.99 72.65,28.45 65.03,24.64 70.11,25.91 77.73,23.37 82.81,23.37 82.81,28.45 85.35,30.99 87.89,28.45 90.43,30.99 85.35,25.91 90.43,25.91 76.14,17.84 83.06,17.14 83.95,18.03
  pour Bottom (isolate 0.305): 89.16,6.86 66.3,6.86 arc-90 63.76,9.4 63.76,34.8 arc-90 66.3,37.34 89.16,37.34 arc-90 91.7,34.8 91.7,9.4 arc-90
  pour Top (isolate 0.305, rank 2): 89.16,6.86 66.3,6.86 arc-90 63.76,9.4 63.76,34.8 arc-90 66.3,37.34 89.16,37.34 arc-90 91.7,34.8 91.7,9.4 arc-90
GND3  (via drill 0.38)  (25 unrouted)
  Top 0.203: v16.51,49.53 17.75,48.29 18.41,48.29 | 18.41,48.29 18.41,49.02 18.8,49.41 U10.3 20.69,49.41 20.83,49.28 20.83,46.3 D4.2 18.95,45.75 18.41,46.29 18.41,48.29
  Top 0.406: U11.2 14.01,51.82 14.86,50.97 C10.2 14.99,50.67 16.13,49.53 v16.51,49.53 | C12.2 v18.03,53.72 | 12.83,47.54 C11.2 | U12.4 12.19,44.83 12.83,45.47 12.83,47.54 | 12.83,47.54 14.01,47.54 v14.48,48.01
  Bottom 0.406: J8.2 J8.1 J8.3 | J7.2 J7.1 J7.3
  other vias: 13.21,67.06 28.45,67.06 15.75,64.52 25.91,64.52 8.13,61.98 10.67,59.44 13.21,61.98 15.75,59.44 8.13,55.63 13.21,56.9 20.83,54.36 25.91,54.36 25.91,59.44 28.45,61.98 30.99,59.44 33.53,61.98 28.45,56.9 33.53,56.9 19.24,48.83 26.16,48.13 27.05,49.02
  pour Bottom (isolate 0.305): 32.26,37.85 9.4,37.85 arc-90 6.86,40.39 6.86,65.79 arc-90 9.4,68.33 32.26,68.33 arc-90 34.8,65.79 34.8,40.39 arc-90
  pour Top (isolate 0.305, rank 2): 32.26,37.85 9.4,37.85 arc-90 6.86,40.39 6.86,65.79 arc-90 9.4,68.33 32.26,68.33 arc-90 34.8,65.79 34.8,40.39 arc-90
GND4  (via drill 0.38)  (25 unrouted)
  Top 0.203: v44.96,49.53 46.2,48.29 46.87,48.29 | 46.87,48.29 46.87,49.02 47.25,49.41 U13.3 49.14,49.41 49.28,49.28 49.28,46.3 D5.2 47.41,45.75 46.87,46.29 46.87,48.29
  Top 0.406: U14.2 42.46,51.82 43.31,50.97 C13.2 43.44,50.67 44.58,49.53 v44.96,49.53 | C15.2 v46.48,53.72 | 41.28,47.54 C14.2 | U15.4 40.64,44.83 41.28,45.47 41.28,47.54 | 41.28,47.54 42.46,47.54 v42.93,48.01
  Bottom 0.406: J10.2 J10.1 J10.3 | J9.2 J9.1 J9.3
  other vias: 41.66,67.06 56.9,67.06 44.2,64.52 54.36,64.52 36.58,61.98 39.12,59.44 41.66,61.98 44.2,59.44 36.58,55.63 41.66,56.9 49.28,54.36 54.36,54.36 54.36,59.44 56.9,61.98 59.44,59.44 61.98,61.98 56.9,56.9 61.98,56.9 47.69,48.83 54.61,48.13 55.5,49.02
  pour Bottom (isolate 0.305): 60.71,37.85 37.85,37.85 arc-90 35.31,40.39 35.31,65.79 arc-90 37.85,68.33 60.71,68.33 arc-90 63.25,65.79 63.25,40.39 arc-90
  pour Top (isolate 0.305, rank 2): 60.71,37.85 37.85,37.85 arc-90 35.31,40.39 35.31,65.79 arc-90 37.85,68.33 60.71,68.33 arc-90 63.25,65.79 63.25,40.39 arc-90
GND5  (via drill 0.38)  (25 unrouted)
  Top 0.203: v73.41,49.53 74.66,48.29 75.32,48.29 | 75.32,48.29 75.32,49.02 75.7,49.41 U16.3 77.59,49.41 77.73,49.28 77.73,46.3 D6.2 75.86,45.75 75.32,46.29 75.32,48.29
  Top 0.406: U17.2 70.91,51.82 71.76,50.97 C16.2 71.89,50.67 73.03,49.53 v73.41,49.53 | C18.2 v74.94,53.72 | 69.73,47.54 C17.2 | U18.4 69.09,44.83 69.73,45.47 69.73,47.54 | 69.73,47.54 70.91,47.54 v71.38,48.01
  Bottom 0.406: J12.2 J12.1 J12.3 | J11.2 J11.1 J11.3
  other vias: 70.11,67.06 85.35,67.06 72.65,64.52 82.81,64.52 65.03,61.98 67.57,59.44 70.11,61.98 72.65,59.44 65.03,55.63 70.11,56.9 77.73,54.36 82.81,54.36 82.81,59.44 85.35,61.98 87.89,59.44 90.43,61.98 85.35,56.9 90.43,56.9 76.14,48.83 83.06,48.13 83.95,49.02
  pour Bottom (isolate 0.305): 89.16,37.85 66.3,37.85 arc-90 63.76,40.39 63.76,65.79 arc-90 66.3,68.33 89.16,68.33 arc-90 91.7,65.79 91.7,40.39 arc-90
  pour Top (isolate 0.305, rank 2): 89.16,37.85 66.3,37.85 arc-90 63.76,40.39 63.76,65.79 arc-90 66.3,68.33 89.16,68.33 arc-90 91.7,65.79 91.7,40.39 arc-90
GND6  (via drill 0.38)  (25 unrouted)
  Top 0.203: v16.51,80.52 17.75,79.27 18.41,79.27 | 18.41,79.27 18.41,80.01 18.8,80.4 U19.3 20.69,80.4 20.83,80.26 20.83,77.28 D7.2 18.95,76.73 18.41,77.27 18.41,79.27
  Top 0.406: U20.2 14.01,82.8 14.86,81.95 C19.2 14.99,81.66 16.13,80.52 v16.51,80.52 | C21.2 v18.03,84.71 | 12.83,78.53 C20.2 | U21.4 12.19,75.82 12.83,76.45 12.83,78.53 | 12.83,78.53 14.01,78.53 v14.48,78.99
  Bottom 0.406: J14.2 J14.1 J14.3 | J13.2 J13.1 J13.3
  other vias: 13.21,98.04 28.45,98.04 15.75,95.5 25.91,95.5 8.13,92.96 10.67,90.42 13.21,92.96 15.75,90.42 8.13,86.61 13.21,87.88 20.83,85.34 25.91,85.34 25.91,90.42 28.45,92.96 30.99,90.42 33.53,92.96 28.45,87.88 33.53,87.88 19.24,79.82 26.16,79.12 27.05,80.01
  pour Bottom (isolate 0.305): 32.26,68.83 9.4,68.83 arc-90 6.86,71.37 6.86,96.77 arc-90 9.4,99.31 32.26,99.31 arc-90 34.8,96.77 34.8,71.37 arc-90
  pour Top (isolate 0.305, rank 2): 32.26,68.83 9.4,68.83 arc-90 6.86,71.37 6.86,96.77 arc-90 9.4,99.31 32.26,99.31 arc-90 34.8,96.77 34.8,71.37 arc-90
GND7  (via drill 0.38)  (25 unrouted)
  Top 0.203: v44.96,80.52 46.2,79.27 46.87,79.27 | 46.87,79.27 46.87,80.01 47.25,80.4 U22.3 49.14,80.4 49.28,80.26 49.28,77.28 D8.2 47.41,76.73 46.87,77.27 46.87,79.27
  Top 0.406: U23.2 42.46,82.8 43.31,81.95 C22.2 43.44,81.66 44.58,80.52 v44.96,80.52 | C24.2 v46.48,84.71 | 41.28,78.53 C23.2 | U24.4 40.64,75.82 41.28,76.45 41.28,78.53 | 41.28,78.53 42.46,78.53 v42.93,78.99
  Bottom 0.406: J16.2 J16.1 J16.3 | J15.2 J15.1 J15.3
  other vias: 41.66,98.04 56.9,98.04 44.2,95.5 54.36,95.5 36.58,92.96 39.12,90.42 41.66,92.96 44.2,90.42 36.58,86.61 41.66,87.88 49.28,85.34 54.36,85.34 54.36,90.42 56.9,92.96 59.44,90.42 61.98,92.96 56.9,87.88 61.98,87.88 47.69,79.82 54.61,79.12 55.5,80.01
  pour Bottom (isolate 0.305): 60.71,68.83 37.85,68.83 arc-90 35.31,71.37 35.31,96.77 arc-90 37.85,99.31 60.71,99.31 arc-90 63.25,96.77 63.25,71.37 arc-90
  pour Top (isolate 0.305, rank 2): 60.71,68.83 37.85,68.83 arc-90 35.31,71.37 35.31,96.77 arc-90 37.85,99.31 60.71,99.31 arc-90 63.25,96.77 63.25,71.37 arc-90
GND8  (via drill 0.38)  (25 unrouted)
  Top 0.203: v73.41,80.52 74.66,79.27 75.32,79.27 | 75.32,79.27 75.32,80.01 75.7,80.4 U25.3 77.59,80.4 77.73,80.26 77.73,77.28 D9.2 75.86,76.73 75.32,77.27 75.32,79.27
  Top 0.406: U26.2 70.91,82.8 71.76,81.95 C25.2 71.89,81.66 73.03,80.52 v73.41,80.52 | C27.2 v74.94,84.71 | 69.73,78.53 C26.2 | U27.4 69.09,75.82 69.73,76.45 69.73,78.53 | 69.73,78.53 70.91,78.53 v71.38,78.99
  Bottom 0.406: J18.2 J18.1 J18.3 | J17.2 J17.1 J17.3
  other vias: 70.11,98.04 85.35,98.04 72.65,95.5 82.81,95.5 65.03,92.96 67.57,90.42 70.11,92.96 72.65,90.42 65.03,86.61 70.11,87.88 77.73,85.34 82.81,85.34 82.81,90.42 85.35,92.96 87.89,90.42 90.43,92.96 85.35,87.88 90.43,87.88 76.14,79.82 83.06,79.12 83.95,80.01
  pour Bottom (isolate 0.305): 89.16,68.83 66.3,68.83 arc-90 63.76,71.37 63.76,96.77 arc-90 66.3,99.31 89.16,99.31 arc-90 91.7,96.77 91.7,71.37 arc-90
  pour Top (isolate 0.305, rank 2): 89.16,68.83 66.3,68.83 arc-90 63.76,71.37 63.76,96.77 arc-90 66.3,99.31 89.16,99.31 arc-90 91.7,96.77 91.7,71.37 arc-90
N$1
  Top 0.406: D2.3 47.11,12.93 46.2,13.84 U6.5
N$2  (via drill 0.38)  (1 unrouted)
  Top 0.203: U1.1 18.08,19.42 | 18.08,19.93 C3.1
  Top 0.406: R2.1 C3.1 | U3.1 10.67,17.65 11.56,16.76 v11.56,14.86 | v18.03,18.8 18.08,18.84 18.08,19.42
  Bottom 0.406: v11.56,14.86 14.1,14.86 v18.03,18.8
N$3  (via drill 0.38)  (1 unrouted)
  Top 0.203: U4.1 46.53,19.42 | 46.53,19.93 C6.1
  Top 0.406: R1.1 C6.1 | U6.1 39.12,17.65 40.01,16.76 v40.01,14.86 | v46.48,18.8 46.53,18.84 46.53,19.42
  Bottom 0.406: v40.01,14.86 42.55,14.86 v46.48,18.8
N$4
  Top 0.406: D1.3 18.66,12.93 17.74,13.84 U3.5
N$5
  Top 0.406: D3.3 75.56,12.93 74.65,13.84 U9.5
N$6  (via drill 0.38)  (1 unrouted)
  Top 0.203: U7.1 74.98,19.42 | 74.98,19.93 C9.1
  Top 0.406: R3.1 C9.1 | U9.1 67.57,17.65 68.46,16.76 v68.46,14.86 | v74.94,18.8 74.98,18.84 74.98,19.42
  Bottom 0.406: v68.46,14.86 71,14.86 v74.94,18.8
N$7
  Top 0.406: D4.3 18.66,43.92 17.74,44.83 U12.5
N$8  (via drill 0.38)  (1 unrouted)
  Top 0.203: U10.1 18.08,50.41 | 18.08,50.92 C12.1
  Top 0.406: R4.1 C12.1 | U12.1 10.67,48.64 11.56,47.75 v11.56,45.85 | v18.03,49.78 18.08,49.83 18.08,50.41
  Bottom 0.406: v11.56,45.85 14.1,45.85 v18.03,49.78
N$9
  Top 0.406: D5.3 47.11,43.92 46.2,44.83 U15.5
N$10  (via drill 0.38)  (1 unrouted)
  Top 0.203: U13.1 46.53,50.41 | 46.53,50.92 C15.1
  Top 0.406: R5.1 C15.1 | U15.1 39.12,48.64 40.01,47.75 v40.01,45.85 | v46.48,49.78 46.53,49.83 46.53,50.41
  Bottom 0.406: v40.01,45.85 42.55,45.85 v46.48,49.78
N$11
  Top 0.406: D6.3 75.56,43.92 74.65,44.83 U18.5
N$12  (via drill 0.38)  (1 unrouted)
  Top 0.203: U16.1 74.98,50.41 | 74.98,50.92 C18.1
  Top 0.406: R6.1 C18.1 | U18.1 67.57,48.64 68.46,47.75 v68.46,45.85 | v74.94,49.78 74.98,49.83 74.98,50.41
  Bottom 0.406: v68.46,45.85 71,45.85 v74.94,49.78
N$13
  Top 0.406: D7.3 18.66,74.9 17.74,75.82 U21.5
N$14  (via drill 0.38)  (1 unrouted)
  Top 0.203: U19.1 18.08,81.4 | 18.08,81.91 C21.1
  Top 0.406: R7.1 C21.1 | U21.1 10.67,79.63 11.56,78.74 v11.56,76.84 | v18.03,80.77 18.08,80.82 18.08,81.4
  Bottom 0.406: v11.56,76.84 14.1,76.84 v18.03,80.77
N$15
  Top 0.406: D8.3 47.11,74.9 46.2,75.82 U24.5
N$16  (via drill 0.38)  (1 unrouted)
  Top 0.203: U22.1 46.53,81.4 | 46.53,81.91 C24.1
  Top 0.406: R8.1 C24.1 | U24.1 39.12,79.63 40.01,78.74 v40.01,76.84 | v46.48,80.77 46.53,80.82 46.53,81.4
  Bottom 0.406: v40.01,76.84 42.55,76.84 v46.48,80.77
N$17
  Top 0.406: D9.3 75.56,74.9 74.65,75.82 U27.5
N$18  (via drill 0.38)  (1 unrouted)
  Top 0.203: U25.1 74.98,81.4 | 74.98,81.91 C27.1
  Top 0.406: R9.1 C27.1 | U27.1 67.57,79.63 68.46,78.74 v68.46,76.84 | v74.94,80.77 74.98,80.82 74.98,81.4
  Bottom 0.406: v68.46,76.84 71,76.84 v74.94,80.77
SCL  (via drill 0.38)
  Top 0.203: U1.6 24.64,19.42 25.27,18.79 v25.27,15.49
  Bottom 0.203: J2.10 28.28,16.38 27.39,15.49 v25.27,15.49 22.86,13.08 10.67,13.08 9.91,13.84 9.91,16 9.52,16.38 J1.10
SCL1  (via drill 0.38)
  Top 0.203: U4.6 53.09,19.42 53.72,18.79 v53.72,15.49
  Bottom 0.203: J4.10 56.73,16.38 55.84,15.49 v53.72,15.49 51.31,13.08 39.12,13.08 38.36,13.84 38.36,16 37.98,16.38 J3.10
SCL2  (via drill 0.38)
  Top 0.203: U7.6 81.54,19.42 82.17,18.79 v82.17,15.49
  Bottom 0.203: J6.10 85.18,16.38 84.29,15.49 v82.17,15.49 79.76,13.08 67.57,13.08 66.81,13.84 66.81,16 66.43,16.38 J5.10
SCL3  (via drill 0.38)
  Top 0.203: U10.6 24.64,50.41 25.27,49.78 v25.27,46.48
  Bottom 0.203: J8.10 28.28,47.37 27.39,46.48 v25.27,46.48 22.86,44.07 10.67,44.07 9.91,44.83 9.91,46.99 9.52,47.37 J7.10
SCL4  (via drill 0.38)
  Top 0.203: U13.6 53.09,50.41 53.72,49.78 v53.72,46.48
  Bottom 0.203: J10.10 56.73,47.37 55.84,46.48 v53.72,46.48 51.31,44.07 39.12,44.07 38.36,44.83 38.36,46.99 37.98,47.37 J9.10
SCL5  (via drill 0.38)
  Top 0.203: U16.6 81.54,50.41 82.17,49.78 v82.17,46.48
  Bottom 0.203: J12.10 85.18,47.37 84.29,46.48 v82.17,46.48 79.76,44.07 67.57,44.07 66.81,44.83 66.81,46.99 66.43,47.37 J11.10
SCL6  (via drill 0.38)
  Top 0.203: U19.6 24.64,81.4 25.27,80.76 v25.27,77.47
  Bottom 0.203: J14.10 28.28,78.36 27.39,77.47 v25.27,77.47 22.86,75.06 10.67,75.06 9.91,75.82 9.91,77.98 9.52,78.36 J13.10
SCL7  (via drill 0.38)
  Top 0.203: U22.6 53.09,81.4 53.72,80.76 v53.72,77.47
  Bottom 0.203: J16.10 56.73,78.36 55.84,77.47 v53.72,77.47 51.31,75.06 39.12,75.06 38.36,75.82 38.36,77.98 37.98,78.36 J15.10
SCL8  (via drill 0.38)
  Top 0.203: U25.6 81.54,81.4 82.17,80.76 v82.17,77.47
  Bottom 0.203: J18.10 85.18,78.36 84.29,77.47 v82.17,77.47 79.76,75.06 67.57,75.06 66.81,75.82 66.81,77.98 66.43,78.36 J17.10
SDA  (via drill 0.38)
  Top 0.203: U1.4 24,18.42 24.51,17.91 v24.51,16.26
  Bottom 0.203: J2.8 28.15,17.65 26.75,16.26 v24.51,16.26 24.51,16.23 21.74,13.46 10.92,13.46 10.26,14.12 10.26,16.89 9.5,17.65 J1.8
SDA1  (via drill 0.38)
  Top 0.203: U4.4 52.45,18.42 52.96,17.91 v52.96,16.26
  Bottom 0.203: J4.8 56.6,17.65 55.2,16.26 v52.96,16.26 52.96,16.23 50.19,13.46 39.37,13.46 38.71,14.12 38.71,16.89 37.95,17.65 J3.8
SDA2  (via drill 0.38)
  Top 0.203: U7.4 80.9,18.42 81.41,17.91 v81.41,16.26
  Bottom 0.203: J6.8 85.05,17.65 83.65,16.26 v81.41,16.26 81.41,16.23 78.64,13.46 67.82,13.46 67.16,14.12 67.16,16.89 66.4,17.65 J5.8
SDA3  (via drill 0.38)
  Top 0.203: U10.4 24,49.41 24.51,48.9 v24.51,47.24
  Bottom 0.203: J8.8 28.15,48.64 26.75,47.24 v24.51,47.24 24.51,47.22 21.74,44.45 10.92,44.45 10.26,45.11 10.26,47.88 9.5,48.64 J7.8
SDA4  (via drill 0.38)
  Top 0.203: U13.4 52.45,49.41 52.96,48.9 v52.96,47.24
  Bottom 0.203: J10.8 56.6,48.64 55.2,47.24 v52.96,47.24 52.96,47.22 50.19,44.45 39.37,44.45 38.71,45.11 38.71,47.88 37.95,48.64 J9.8
SDA5  (via drill 0.38)
  Top 0.203: U16.4 80.9,49.41 81.41,48.9 v81.41,47.24
  Bottom 0.203: J12.8 85.05,48.64 83.65,47.24 v81.41,47.24 81.41,47.22 78.64,44.45 67.82,44.45 67.16,45.11 67.16,47.88 66.4,48.64 J11.8
SDA6  (via drill 0.38)
  Top 0.203: U19.4 24,80.4 24.51,79.89 v24.51,78.23
  Bottom 0.203: J14.8 28.15,79.63 26.75,78.23 v24.51,78.23 24.51,78.21 21.74,75.44 10.92,75.44 10.26,76.1 10.26,78.87 9.5,79.63 J13.8
SDA7  (via drill 0.38)
  Top 0.203: U22.4 52.45,80.4 52.96,79.89 v52.96,78.23
  Bottom 0.203: J16.8 56.6,79.63 55.2,78.23 v52.96,78.23 52.96,78.21 50.19,75.44 39.37,75.44 38.71,76.1 38.71,78.87 37.95,79.63 J15.8
SDA8  (via drill 0.38)
  Top 0.203: U25.4 80.9,80.4 81.41,79.89 v81.41,78.23
  Bottom 0.203: J18.8 85.05,79.63 83.65,78.23 v81.41,78.23 81.41,78.21 78.64,75.44 67.82,75.44 67.16,76.1 67.16,78.87 66.4,79.63 J17.8

## Text on the board
Top: ROUTE OUT | ROUTE OUT | ROUTE OUT | ROUTE OUT | ROUTE OUT | ROUTE OUT | ROUTE OUT | ROUTE OUT | ROUTE OUT
Bottom: v10 | SENSOR | v10 | SENSOR | v10 | SENSOR | v10 | SENSOR | v10 | SENSOR | v10 | SENSOR | v10 | SENSOR | v10 | SENSOR | v10 | SENSOR
bPlace: IN | OUT | IN | OUT | IN | OUT | IN | OUT | IN | OUT | IN | OUT | IN | OUT | IN | OUT | IN | OUT
Milling: v-score | v-score | v-score | v-score | v-score | v-score | v-score | v-score